# EAGLE board 555 Monostable (EAGLE 6.5.0)
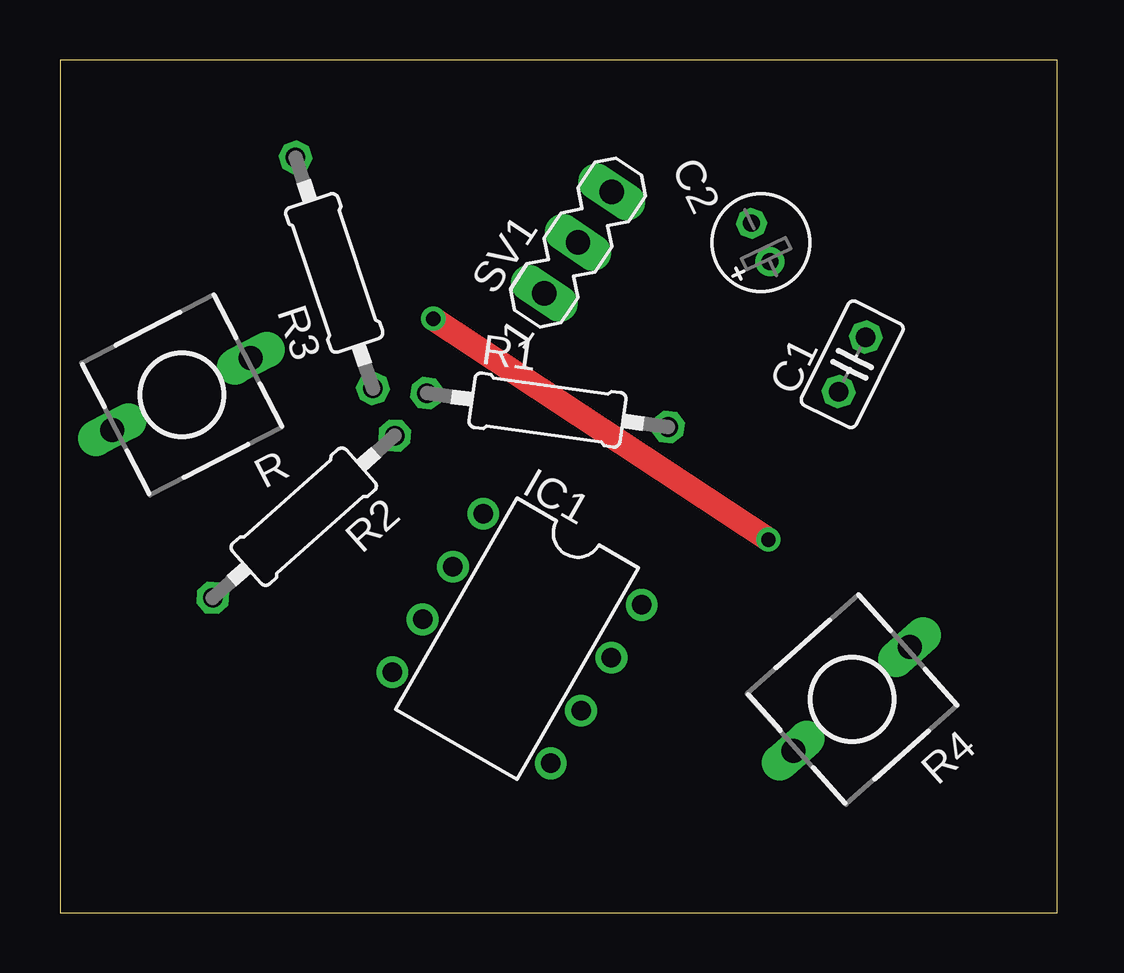
[diagram p0: board, top side]
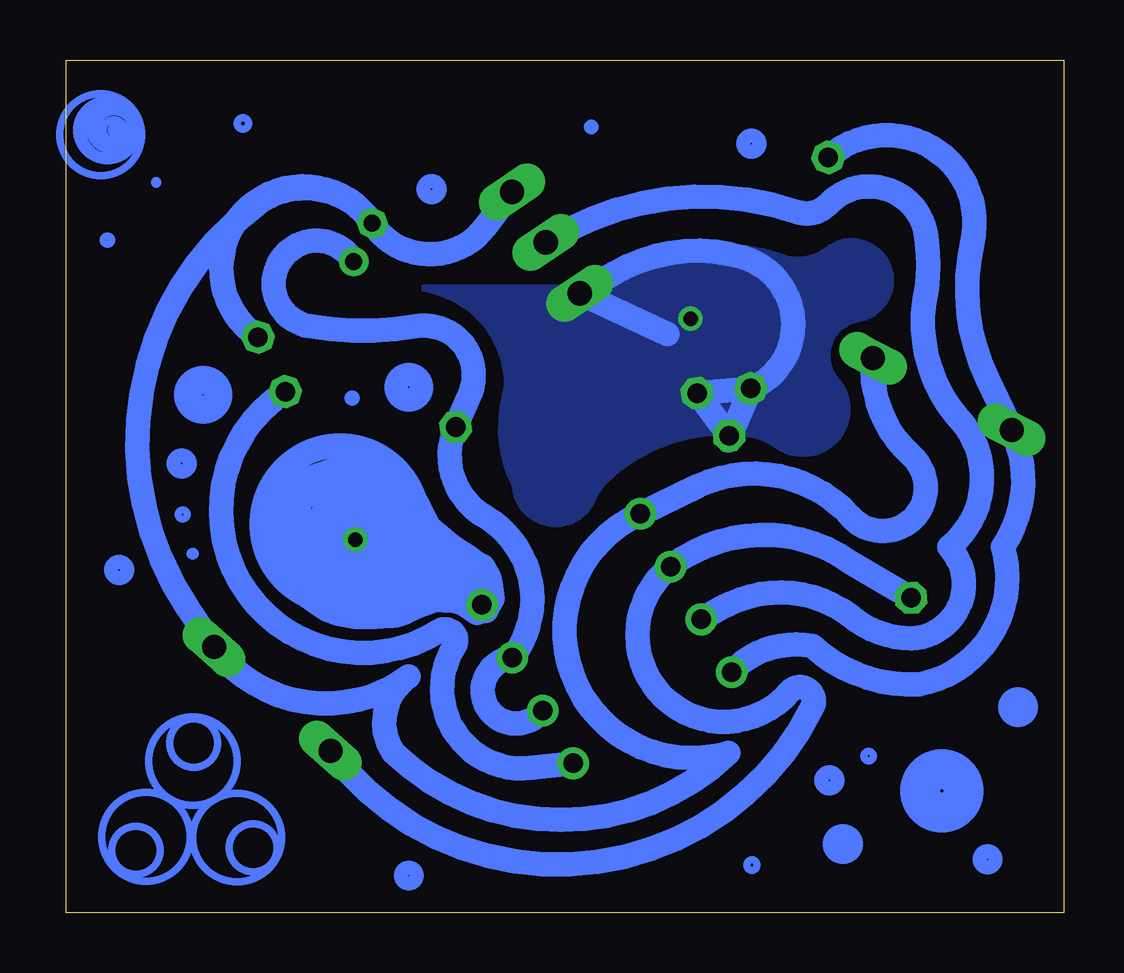
[diagram p1: board, bottom side, seen from below]

Size 41.58 x 35.55 mm. Coordinates in mm from the lower left corner, seen from the top.
Outline: 0,0 41.58,0 41.58,35.55 0,35.55 0,0
Copper layers (1*16): Top 0.035mm / dielectric 1.5mm / Bottom 0.035mm
Design rules "default": minimum track width 10mil, minimum drill 24mil, track to track 8mil, track to pad 8mil, pad to pad 8mil, via to via 8mil, smd to smd 8mil, copper to edge 40mil, drill to drill 8mil, minimum pad ring 10mil, minimum via ring 8mil, stop-mask expansion 4mil, vias tented up to drill 0mil, thermal gap 10mil

## Footprints (pad centres in the part's own frame; a part is rotated, then mirrored left to right if it is on the bottom)
C025-025X050 = drill 0.813 octagon: 1 -1.27,0; 2 1.27,0
E1,8-4 = drill 0.711 pad 1.168: + -0.889,0 | drill 0.711 pad 1.168 octagon: - 0.889,0
DIL08 = drill 0.813 pad 1.27: 1 -3.81,-3.81; 2 -1.27,-3.81; 3 1.27,-3.81; 4 3.81,-3.81; 5 3.81,3.81; 6 1.27,3.81; 7 -1.27,3.81; 8 -3.81,3.81
2PIN = drill 1 long: 1 -3.25,-0.036; 2 3.25,-0.036
0207/10 = drill 0.813 octagon: 1 -5.08,0; 2 5.08,0
MA03-1 = drill 1.016 long: 1 -2.54,0; 2 0,0; 3 2.54,0

## Placement (x,y rotation side)
C1  0.01uF  [C025-025X050]  33.02,22.86 63.5 top
C2  [E1,8-4]  29.21,27.94 115.7 top
IC1  LM555N  [DIL08]  19.05,11.43 240.1 top
R  2PIN  [2PIN]  5.08,21.59 207.3 top
R1  [0207/10]  20.32,20.95 352 top
R2  10K  [0207/10]  10.16,16.51 221.7 top
R3  10K  [0207/10]  11.43,26.67 108.5 top
R4  2PIN  [2PIN]  33.02,8.89 221.7 top
SV1  [MA03-1]  21.59,27.94 56.3 top

## Library data of the parts
C1 = rcl
C2 R1-R3 = resistor
IC1 = linear
R R4 = switch-tact
SV1 = con-lstb; OC_FARNELL: unknown; OC_NEWARK: unknown

## Nets
GND: C1.2 C2.- IC1.1 R4.1 R.1 SV1.3
N$1: IC1.4 R3.2 R.2
N$2: IC1.3 SV1.2
N$3: C1.1 IC1.5
N$4: C2.+ IC1.6 IC1.7 R1.2
TR: IC1.2 R2.2 R4.2
V+: IC1.8 R1.1 R2.1 R3.1 SV1.1

## Tracks (layer width: path | path; a pad name or v marks a point on that pad's centre or on a via)
GND
  Bottom 1.016: R.1 arc-53 6.35,19.05 arc186 8.89,16.51 arc-74 15.24,17.78 IC1.1 arc-173 13.97,6.67 arc87 27.94,6.67 arc90 27.3,9.84 arc90 R4.1 36.51,12.7 arc87 33.66,29.53 arc92 C2.- | SV1.3 24.13,28.57 arc109 C2.- | C2.- arc-203 C1.2
N$1
  Bottom 1.016: R3.2 arc145 3.81,27.94 arc-38 3.17,22.23 R.2 arc60 2.54,15.24 arc96 6.03,9.53 arc45 10.48,11.11 arc-59 IC1.4
N$2
  Bottom 1.016: IC1.3 14.29,12.7 arc66 8.89,12.38 arc-39 6.35,11.43 arc-130 4.76,15.24 arc-87 4.13,20.32 arc57 5.71,26.04 arc-15 5.71,27.94 arc-136 9.84,29.53 arc65 11.11,29.21 arc-51 SV1.2
N$3
  Bottom 1.016: IC1.5 22.23,6.03 arc129 25.4,11.11 arc-155 26.04,11.75 arc179 C1.1
N$4
  Bottom 1.016: C2.+ arc-230 31.43,24.45 arc-19 26.99,24.45 arc123 24.77,21.59 R1.2 arc-83 24.13,16.51 arc97 IC1.7 arc-217 21.91,8.26 IC1.6
TR
  Bottom 1.016: R2.2 8.89,14.61 arc-73 IC1.2 arc-191 11.43,9.21 arc166 10.48,8.57 arc117 R4.2
V+  (via drill 0.6)
  Top 1.016: v15.56,24.77 v29.53,15.56
  Bottom 1.016: R2.1 R1.1 R3.1 arc-140 13.34,27.3 arc-47 18.73,26.67 SV1.1 16.51,24.13 | 13.02,21.91 13.97,19.68 13.97,20.32 | IC1.8 v29.53,15.56 27.55,18.08 | 27.55,18.08 27,17.12 26.55,16.19 26.16,15.83 25.75,15.48 25.33,15.16 24.88,14.87 24.59,14.64 24.24,14.45 23.95,13.97 23.89,13.55 23.82,13.07 24.08,12.59 24.46,12.49 25.01,12.88 25.39,13.01 27.31,13.07 26.32,13.01 26.9,12.78 27.13,12.69 27.45,12.53 27.83,12.4 28.03,12.37 28.7,12.33 29.54,12.33 30.21,12.46 30.69,12.62 31.14,12.94 31.56,13.23 32.13,13.65 32.97,17.57 29.63,18.76 27.77,17.25 27.58,14.68 30.05,13.46 31.72,14.39 31.91,17.34 29.57,17.76 28.12,16.28 28.73,14.36 31.36,14.52 30.75,17.21 28.6,16.22 29.82,14.45 31.04,16.09 29.09,15.71 25.88,14.84 24.56,13.2 27.03,14.42 28.16,12.81 26.07,13.87 | 27.55,18.08 29.21,15.24 29.21,16.51
  pour Bottom (no thermals): 20.64,26.04 19.37,26.35 arc53 11.75,27.3 arc-58 9.84,27.62 arc209 8.57,24.77 arc-120 9.53,22.23 arc161 11.75,19.37 arc-100 19.68,17.14 arc149 22.86,17.78 arc43 23.18,21.91 arc-82 26.67,26.04
  pour Bottom (no thermals): 9.21,21.59 9.84,20.32 arc104 11.11,19.37 arc-85 20.32,16.51 20.32,19.37 12.06,21.59
(copper drawn outside any net)
  shapes: Bottom circle x38